# Altium PCB PCB2.PcbDoc (part 2 of 2)
Units mil, origin at the board's own origin, x right, y up, seen from the top; angles counter-clockwise.
Board outline 3622.05 x 2165.35 mil, 4 copper layers (Top Layer, GND, Sign, Bottom Layer), stack 41.556 mil thick; 150 components, 101 nets, 567 pads, 606 vias.
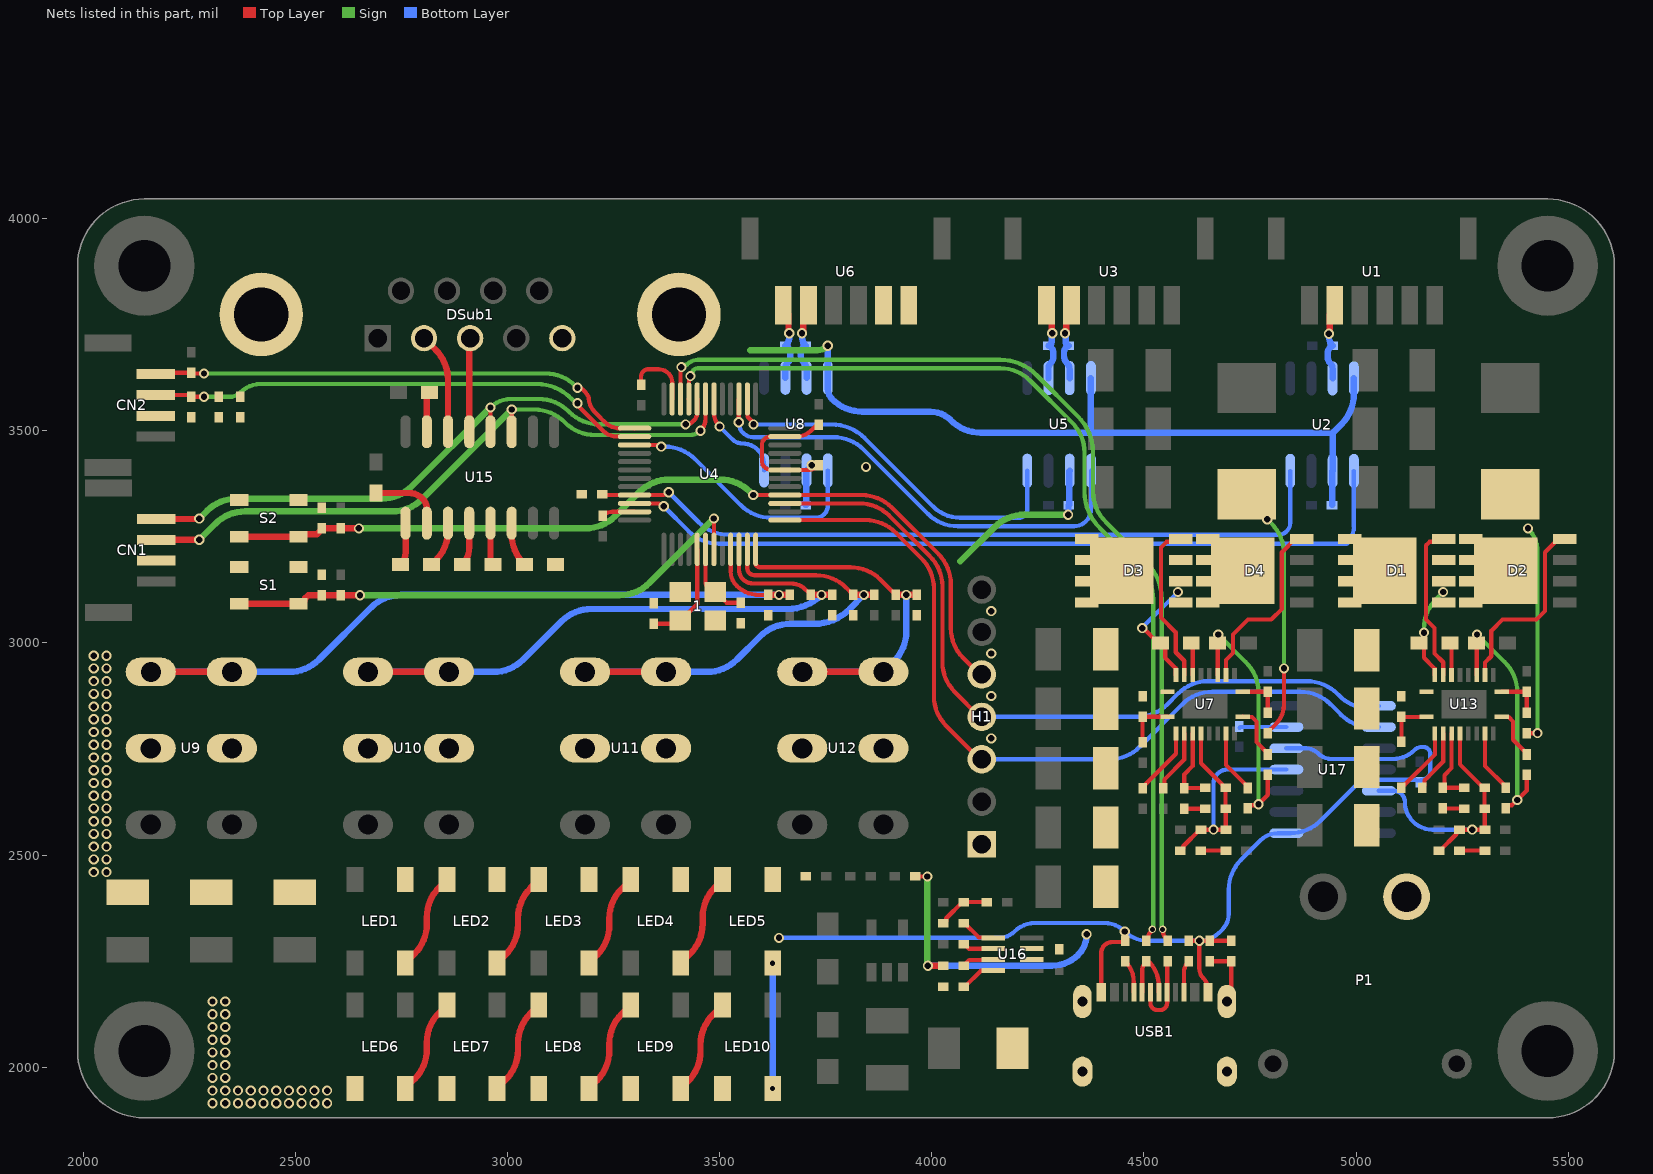
[diagram p4: the nets of this part, all layers, seen from the top]

## Via types
v1: diameter 24, hole 15, Top Layer to Bottom Layer, 572 vias
v2: diameter 18, hole 12, Top Layer to Bottom Layer, 33 vias
v3: diameter 30, hole 18, Top Layer to Bottom Layer, 1 vias

## Nets (pads, with @x,y where several pads share a name; then routed paths per layer and width w, separated by ;. In a path a pad name is that pad's centre, name@x,y a point inside that pad or via, vN(x,y) a via of type N, cw(c..) or ccw(c..) an arc to the next point about the centre after c; other vN are vias at no path point) (continued)
FDCAN1_P: R2.2 U1.5 U2.7 | length 186.3
  Top Layer w15: v1(4935.9,3728.73) ccw(c4931.74,3732.89) 4937.62,3732.89 4937.62,3766.96 cw(c4978,3766.96) U1.5@4949.45,3795.51
  Bottom Layer w15: v1(4935.9,3728.73) 4935.9,3721.97 ccw(c4966.97,3721.97) R2.2@4945,3700 ccw(c4945,3693.96) 4940.73,3698.23 4937.95,3695.45 ccw(c4948.93,3684.47) 4933.4,3684.47 4933.4,3673.18 ccw(c4952.8,3673.18) 4939.08,3659.46 cw(c4925.36,3645.74) 4944.76,3645.74 U2.7@4944.76,3623.6
FDCAN1_RX: R1.2 U2.4 U4.45 | length 1799.1
  Top Layer w10: R1.2@3223.2,3350 ccw(c3226.81,3353.61) 3226.81,3348.5 U4.45@3299.61,3348.5 3364.31,3348.5 ccw(c3364.31,3370.69) v1(3380,3355)
  Bottom Layer w10: v1(3380,3355) 3450.71,3284.29 ccw(c3521.42,3355) 3521.42,3255 4816.82,3255 ccw(c4816.82,3282.95) 4844.76,3282.71 U2.4@4844.76,3405.3
FDCAN1_TX: U2.1 U4.46 | length 1889.8
  Top Layer w10: U4.46@3299.61,3328.82 3357.81,3328.82 3364.43,3322.21 v1(3368.22,3322.21)
  Bottom Layer w10: v1(3368.22,3322.21) 3427.55,3262.87 ccw(c3498.26,3333.58) 3498.26,3233.58 4978.14,3233.58 ccw(c4938,3273.72) 4994.76,3273.72 U2.1@4994.76,3405.3
FDCAN2_N: R3.1 U3.6 U5.6 | length 179.1
  Top Layer w15: U3.6@4270.31,3795.51 cw(c4241.18,3766.38) 4282.38,3766.38 4282.38,3734.16 ccw(c4288.26,3734.16) v1(4284.1,3730)
  Bottom Layer w15: U5.6@4275,3624.15 4275,3645.89 cw(c4294.8,3645.89) 4280.8,3659.89 ccw(c4266.8,3673.9) 4286.6,3673.9 4286.6,3684.47 ccw(c4271.07,3684.47) R3.1@4282.05,3695.45 ; R3.1@4275,3700 ccw(c4275,3706.04) 4279.27,3701.77 ccw(c4271.76,3709.28) 4282.38,3709.28 4282.38,3725.84 cw(c4288.26,3725.84) v1(4284.1,3730)
FDCAN2_P: R3.2 U3.5 U5.7 | length 180
  Top Layer w15: v1(4314.1,3730) 4314.1,3730.26 cw(c4319.35,3730.26) 4315.64,3733.97 ccw(c4311.92,3737.69) 4317.18,3737.69 4317.18,3766.09 cw(c4358.78,3766.09) U3.5@4329.36,3795.51
  Bottom Layer w15: v1(4314.1,3730) cw(c4309.94,3725.84) 4315.82,3725.84 4315.82,3709.28 ccw(c4326.44,3709.28) 4318.93,3701.77 ccw(c4323.2,3706.04) R3.2@4323.2,3700 ; R3.2@4316.15,3695.45 ccw(c4327.13,3684.47) 4311.6,3684.47 4311.6,3676.07 ccw(c4334.48,3676.07) 4318.3,3659.89 cw(c4302.12,3643.72) 4325,3643.72 U5.7@4325,3624.15
FDCAN2_RX: U4.26 U5.4 | length 895.7
  Top Layer w10: U4.26@3565.53,3574.87 3565.7,3574.7 3565.7,3533.09 3580,3518.79 v1(3580,3515)
  Bottom Layer w10: v1(3580,3515) 3763.58,3515 cw(c3763.58,3402.93) 3842.82,3482.17 4004.25,3320.75 ccw(c4066.42,3382.93) 4066.42,3295 4205,3295 ccw(c4205,3315) 4225,3315 U5.4@4225,3405.85
FDCAN2_TX: U4.27 U5.1 | length 1097.6
  Top Layer w10: v1(3545,3520) 3545.33,3520.33 3545.33,3574.55 U4.27@3545.67,3574.88
  Bottom Layer w10: v1(3545,3520) 3545,3519.14 ccw(c3579.14,3519.14) 3555,3495 ccw(c3579.14,3519.14) 3579.14,3485 3768.58,3485 cw(c3768.58,3385) 3839.29,3455.71 3990.71,3304.29 ccw(c4061.42,3375) 4061.42,3275 4334.95,3275 ; 4335,3275 ccw(c4335,3315) 4375,3315 U5.1@4375,3405.85
FDCAN3_N: R5.1 U6.6 U8.6 | length 209.1
  Top Layer w15: U6.6@3662.42,3766.09 ccw(c3620.82,3766.09) U6.6@3650.23,3795.51 cw(c3620.92,3766.19) 3662.38,3766.19 3662.38,3734.16 ccw(c3668.26,3734.16) v1(3664.1,3730)
  Bottom Layer w15: U8.6@3655,3625 3655,3646.74 cw(c3674.8,3646.74) 3660.8,3660.74 ccw(c3646.8,3674.75) 3666.6,3674.75 3666.6,3684.47 ccw(c3651.07,3684.47) R5.1@3662.05,3695.45 ; R5.1@3655,3700 ccw(c3633.03,3721.97) 3664.1,3721.97 v1(3664.1,3730)
FDCAN3_P: R5.2 U6.5 U8.7 | length 177.3
  Top Layer w15: v1(3694.1,3730) 3694.1,3730.31 cw(c3699.22,3730.31) 3695.6,3733.93 ccw(c3691.98,3737.55) 3697.1,3737.55 3697.1,3766.09 cw(c3738.7,3766.09) U6.5@3709.28,3795.51
  Bottom Layer w15: v1(3694.1,3730) 3694.1,3721.97 ccw(c3725.17,3721.97) R5.2@3703.2,3700 ; R5.2@3696.15,3695.45 ccw(c3707.13,3684.47) 3691.6,3684.47 3691.6,3676.92 ccw(c3714.48,3676.92) 3698.3,3660.74 cw(c3682.12,3644.57) 3705,3644.57 U8.7@3705,3625
FDCAN3_RX: U4.30 U8.4 | length 234.2
  Top Layer w10: U4.30@3486.96,3574.53 U4.30@3486.61,3574.88 3486.61,3542.32 ccw(c3532.32,3542.32) v1(3500,3510) v1@3500,3513.79
  Bottom Layer w10: v1(3500,3510) 3530.25,3479.75 ccw(c3553.79,3503.28) 3553.79,3470 cw(c3553.79,3418.79) 3590,3455 cw(c3553.79,3418.79) 3605,3418.79 U8.4@3605,3406.7
FDCAN3_TX: U4.39 U8.1 | length 617.1
  Top Layer w10: U4.39@3299.61,3466.61 3354.6,3466.61 3358.58,3462.63 v1(3362.37,3462.63)
  Bottom Layer w10: v1(3362.37,3462.63) 3370.94,3462.63 cw(c3370.94,3362.63) 3441.66,3433.34 3550.71,3324.29 ccw(c3621.42,3395) 3621.42,3295 3725.9,3295 3725.96,3295 ccw(c3725.96,3324.04) 3755,3324.04 U8.1@3755,3406.7
GND: 1.2 1.4 C1.2 C2.2 C3.1 C4.1 C5.1 C6.1 C7.2 C8.1 C9.2 C10.1 C11.2 C14.1 C17.1 C20.1 C21.1 C22.1 C28.2 C30.2 C32.1 C33.1 C34.1 C35.1 C69.1 CN1.2 CN2.2 DSub1.5 H1.1 LED1.3 LED2.3 LED3.3 LED4.3 LED5.3 LED6.3 LED7.3 LED8.3 LED9.3 LED10.3 R1.1 R6.2 R10.2 R14.2 R44.1 R45.2 R46.2 S1.1 S2.1 U2.2 U2.8 U4.19 U4.23 U4.35 U4.47 U5.2 U5.8 U8.2 U8.8 U9.2 U9.5 U10.2 U10.5 U11.2 U11.5 U12.2 U12.5 U15.15 U17.1 U17.5 USB1.1 USB1.12 | length 5728.4
  Top Layer w8: v1(4455,2320) 4455.63,2319.37 R14.2@4455.63,2298.2
  Top Layer w10: C6.1@3225,3300 cw(c3247.05,3277.95) 3247.05,3309.13 U4.47@3299.61,3309.13 ; C11.2@3315,3608.2 3315,3627.93 cw(c3332.07,3627.93) 3320,3640 cw(c3332.07,3627.93) 3332.07,3645 3355.86,3645 cw(c3355.86,3610.86) 3380,3635 cw(c3360.23,3615.23) 3388.19,3615.23 U4.35@3388.19,3574.88 ; C10.1@3733.46,3418.65 cw(c3706.68,3445.43) 3706.68,3407.56 U4.19@3653.94,3407.56 3622.97,3407.56 cw(c3622.97,3432.97) 3605,3415 cw(c3617.07,3427.07) 3600,3427.07 3600,3467.93 cw(c3617.07,3467.93) 3605,3480 cw(c3620.21,3464.79) 3620.21,3486.3 U4.23@3653.94,3486.3 3681.92,3486.3 ccw(c3681.92,3533.08) 3715,3500 3726.44,3511.44 cw(c3733.46,3504.42) C5.1@3733.46,3514.35 ; USB1.1@4399.37,2176.65 4399.37,2269.37 cw(c4425,2269.37) 4425,2295 4452.43,2295 ccw(c4452.43,2298.2) R14.2@4455.63,2298.2 ; R6.2@4605.63,2298.2 v1(4630.63,2298.2) ; USB1.12@4651.34,2176.65 4651.34,2182.63 ccw(c4612.63,2182.63) 4640,2210 cw(c4662.62,2232.62) 4630.63,2232.62 v1(4630.63,2298.2) ; C9.2@4705.63,2298.2 R10.2@4655.63,2298.2 v1(4630.63,2298.2)
  Top Layer w15: U15.15@2810.01,3497.7 2810.01,3574.34 cw(c2832.16,3574.34) C22.1@2816.5,3590
  Sign w15: 3572.4,3690 3730.24,3690 ccw(c3730.24,3725.02) 3746.11,3693.81 ccw(c3730.24,3725.02) v1(3755,3700.26) ; v1(3717.1,3418.8) cw(c3720,3415.9) v1@3720,3420 ; 4067.54,3192.54 4147.93,3272.93 cw(c4218.64,3202.22) 4218.64,3302.22 v1(4321.36,3302.22)
  Bottom Layer w10: v1(3640,2305) 4158.79,2305 ccw(c4158.79,2356.21) 4195,2320 cw(c4243.28,2271.72) 4243.28,2340 4406.72,2340 cw(c4406.72,2271.72) v1(4455,2320) ccw(c4507.63,2372.63) 4507.63,2298.2 v1(4630.63,2298.2) ccw(c4630.63,2364.76) 4677.69,2317.7 4685,2325 ccw(c4648.79,2361.21) 4700,2361.21 4700,2418.58 cw(c4800,2418.58) 4729.29,2489.29 4775,2535 cw(c4815.25,2494.75) 4815.25,2551.67 U17.1@4835.64,2551.67 4845.25,2551.67 ccw(c4845.25,2651.67) 4915.96,2580.96 5000.77,2665.77 cw(c5028.8,2637.74) 5028.8,2677.38 5136.52,2677.38 cw(c5136.52,2658.32) 5143.46,2676.07 5148.45,2676.07 ccw(c5148.45,2706.55) 5170,2685 ccw(c5157.93,2697.07) 5175,2697.07 5175,2737.93 ccw(c5157.93,2737.93) 5170,2750 ccw(c5157.93,2737.93) 5157.93,2755 5155.4,2755 ccw(c5155.4,2730.13) 5137.82,2747.72 cw(c5087.23,2798.31) 5087.23,2726.76 4941.96,2726.76 cw(c4941.96,2771.96) 4910,2740 ccw(c4881.82,2711.82) 4881.82,2751.67 U17.5@4835.64,2751.67
  Bottom Layer w15: C7.2@3703.2,3325 3704.1,3325.9 3704.1,3405.8 U8.2@3705,3406.7 v1(3717.1,3418.8) ; v1(3755,3700.26) U8.8@3755,3625 3755,3599.14 ccw(c3789.14,3599.14) 3765,3575 3765.71,3574.29 ccw(c3836.42,3645) 3836.42,3545 3996.72,3545 cw(c3996.72,3476.72) 4045,3525 ccw(c4115.32,3593.92) 4115.26,3495.46 4375,3495.46 ; v1(4321.36,3302.22) 4322.28,3303.14 4322.28,3324.08 C2.2@4323.2,3325 4324.1,3325.9 4324.1,3404.95 U5.2@4325,3405.85 ; U5.8@4375,3624.15 4375,3495.46 ; C1.2@4943.2,3325 4943.98,3325.78 4943.98,3404.52 U2.2@4944.76,3405.3 4944.76,3494.76 ; U2.8@4994.76,3623.6 4994.76,3586.19 cw(c4894.76,3586.19) 4965.47,3515.47 4944.76,3494.76 ; 4375,3495.46 4944.76,3495.46 4945,3495.46 4944.76,3494.76
  other v1: 2305,1915 2335,1915 2365,1915 2395,1915 2425,1915 2455,1915 2485,1915 2515,1915 2545,1915 2575,1915 2305,1945 2335,1945 2365,1945 2395,1945 2425,1945 2455,1945 2485,1945 2515,1945 2545,1945 2575,1945 2305,1975 2335,1975 2305,2005 2335,2005 2305,2035 2335,2035 2305,2065 2335,2065 2305,2095 2335,2095 2305,2125 2335,2125 2305,2155 2335,2155 2025,2460 2055,2460 2025,2490 2055,2490 2025,2520 2055,2520 2025,2550 2055,2550 2025,2580 2055,2580 2025,2610 2055,2610 2025,2640 2055,2640 2025,2670 2055,2670 2025,2700 2055,2700 2025,2730 2055,2730 2025,2760 2055,2760 4140,2775 2025,2790 2055,2790 2025,2820 2055,2820 2025,2850 2055,2850 4140,2875 2025,2880 2055,2880 2025,2910 2055,2910 2025,2940 2055,2940 2025,2970 2055,2970 4140,2975 4140,3075 3845,3415
Net1_1: 1.1 C4.2 U4.6 | length 173.7
  Top Layer w10: U4.6@3466.93,3220.55 3466.93,3163.94 3466.93,3144.48 ccw(c3492.01,3144.48) 3472.76,3128.41 3474.52,3126.64 3476.36,3125.88 1.1@3489.8,3120.32 3491.77,3120.32 3510.39,3101.69 3510.39,3100.86 3516.25,3095 C4.2@3540,3095
Net1_3: 1.3 C3.2 U4.5 | length 248.6
  Top Layer w10: C3.2@3345,3045 3398.74,3045 1.3@3407.13,3053.39 ; 1.3@3409.09,3053.39 3447.24,3091.53 U4.5@3447.24,3220.55
NetC8_2: C8.2 R4.1 S1.2 U4.7 | length 1276.3
  Top Layer w10: U4.7@3486.61,3220.55 v1(3486.61,3293.39)
  Top Layer w15: S1.2@2367.68,3092.28 S1.2@2507.44,3092.28 2515.32,3092.28 2521.6,3098.56 2521.6,3103.6 2530.38,3112.39 C8.2@2562.56,3112.39 R4.1@2607.56,3112.39 v1(2652.39,3112.39)
  Sign w10: v1@3485,3295 cw(c3485,3293.39) v1(3486.61,3293.39)
  Sign w15: v1(2652.39,3112.39) 3264.2,3112.39 ccw(c3264.2,3212.39) 3334.91,3141.68 v1(3486.61,3293.39)
NetC9_1: C9.1 R10.1 USB1.13 USB1.14 | length 147.7
  Top Layer w10: R10.1@4655.63,2250 C9.1@4705.63,2250 4705.63,2179.14 cw(c4671.49,2179.14) USB1.14@4695.63,2155
NetC15_1: C15.1 R12.1 | length 60.1
  Top Layer w10: C15.1@5243.71,2510.83 R12.1@5303.78,2510.83
NetC24_1: C24.1 C25.2 U13.4 | length 186.8
  Top Layer w10: U13.4@5225.1,2786.41 5225.1,2705.1 5208.26,2688.26 5208.26,2662.38 C24.1@5204.34,2658.46 5208.26,2658.46 C25.2@5254.57,2658.46
NetC24_2: C24.2 R25.2 | length 50.6
  Top Layer w10: C24.2@5204.34,2610.26 5204.85,2609.76 5254.06,2609.76 R25.2@5254.57,2609.25
NetC26_1: C26.1 U15.2 | length 174
  Top Layer w15: C26.1@2690,3353.5 2767.41,3353.5 cw(c2767.41,3307.41) 2800,3340 cw(c2775.82,3315.82) 2810.01,3315.82 U15.2@2810.01,3282.3
NetC27_1: C27.1 U15.1 | length 100.4
  Top Layer w15: C27.1@2748.5,3185 ccw(c2720.7,3212.8) 2760.01,3212.8 U15.1@2760.01,3282.3
NetC27_2: C27.2 U15.3 | length 109
  Top Layer w15: C27.2@2821.5,3185 2830.72,3194.22 ccw(c2760.01,3264.94) 2860.01,3264.94 U15.3@2860.01,3282.3
NetC28_1: C28.1 U15.6 | length 105.4
  Top Layer w15: U15.6@3010.01,3282.3 3010.01,3256.41 ccw(c3110.01,3256.41) 3039.3,3185.7 C28.1@3040,3185
NetC29_1: C29.1 U15.4 | length 101.7
  Top Layer w15: C29.1@2893.5,3185 ccw(c2853.63,3224.87) 2910.01,3224.87 U15.4@2910.01,3282.3
NetC29_2: C29.2 U15.5 | length 99
  Top Layer w15: U15.5@2960.01,3282.3 2960.01,3200.66 ccw(c2982.16,3200.66) C29.2@2966.5,3185
NetC30_1: C30.1 DSub1.10 DSub1.11 R46.1
NetC41_1: C41.1 C43.2 U7.4 | length 186.9
  Top Layer w10: U7.4@4614.86,2786.5 4614.86,2709.86 4595.12,2690.12 C41.1@4595.12,2657.45 4595.62,2657.96 4643.82,2657.96 C43.2@4644.33,2658.46
NetC41_2: C41.2 R23.2 | length 49.2
  Top Layer w10: C41.2@4595.12,2609.25 R23.2@4644.33,2609.25
NetC42_1: C42.1 D1.3 D2.2 L1.1 R32.1 U13.19 | length 742.9
  Top Layer w10: v1(5160,3024.39) 5160,3010 5150,3000 5160,2990 5160,2965 5185.15,2939.85 5185.15,2924.65 U13.19@5185.67,2924.13 ; R32.1@5402.2,2787.43 v1(5427.43,2787.43)
  Sign w10: v1(5160,3024.39) 5160,3033.58 cw(c5260,3033.58) 5189.29,3104.29 v1(5205,3120) ; v1(5405,3270) cw(c5350.85,3215.85) 5427.43,3215.85 v1(5427.43,2787.43)
NetC42_2: C42.2 U13.17 | length 77.3
  Top Layer w10: C42.2@5221.5,3000 5225.04,2996.46 U13.17@5225.04,2924.13
NetC44_1: C44.1 U13.3 | length 148.4
  Top Layer w10: C44.1@5156.14,2658.46 5161.14,2663.46 5161.14,2676.14 5205.42,2720.42 U13.3@5205.42,2786.41
NetC49_2: C49.2 R30.2 R40.2 U13.14 | length 629.9
  Top Layer w10: U13.14@5284.1,2924.13 5284.1,2999.4 5285,3000.31 v1(5285,3020) ; R40.2@5352.99,2610.26 5352.99,2612.76 5357.99,2617.76 5367.14,2617.76 5379.38,2630 v1(5380,2630) ; v1@5377.32,2627.32 v1(5380,2630) ; R30.2@5402.2,2689 5402.2,2652.2 v1(5380,2630)
  Sign w10: v1(5285,3020) 5350.71,2954.29 cw(c5280,2883.58) 5380,2883.58 v1(5380,2630)
NetC50_2: C50.2 R32.2 U13.11 | length 108.2
  Top Layer w10: U13.11@5343.15,2884.76 5343.19,2884.8 C50.2@5402.2,2884.84 R32.2@5402.2,2835.63
NetC51_1: C51.1 R22.1 | length 60.1
  Top Layer w10: C51.1@4633.48,2510.83 R22.1@4693.54,2510.83
NetC52_1: C52.1 D3.3 D4.2 L2.1 R33.1 U7.19 | length 797.3
  Top Layer w10: v1(4496.15,3035) 4498.5,3035 4533.5,3000 C52.1@4538.5,3000 4540,3000 4550,2990 4550,2965 4574.92,2940.08 4574.92,2924.73 U7.19@4575.43,2924.22 ; R33.1@4791.97,2787.43 4791.97,2789.93 4810.98,2808.95 ccw(c4765.08,2854.85) 4830,2854.85 v1(4830,2940)
  Sign w10: v1(4790.76,3291.28) 4800.71,3281.33 cw(c4730,3210.62) 4800.77,3281.26 cw(c4730,3210.62) 4830,3210.62 v1(4830,2940)
  Bottom Layer w10: v1(4496.15,3035) 4496.15,3036.16 v1(4580,3120)
NetC52_2: C52.2 U7.17 | length 77.1
  Top Layer w10: C52.2@4611.5,3000 4614.8,2996.7 U7.17@4614.8,2924.22
NetC53_1: C53.1 U7.3 | length 149.5
  Top Layer w10: C53.1@4545.91,2657.45 4548.54,2660.08 4548.54,2678.54 4595.18,2725.18 U7.3@4595.18,2786.5
NetC59_2: C59.2 R31.2 R42.2 U7.14 | length 640
  Top Layer w10: U7.14@4673.86,2924.22 4673.86,2999.64 C59.2@4673.5,3000 ccw(c4669.88,3003.62) 4675,3003.62 v1(4675,3020) ; R42.2@4745,2610 4745,2612.32 4750,2617.32 4767.32,2617.32 v1(4770,2620) 4791.97,2641.97 R31.2@4791.97,2689
  Sign w10: v1(4675,3020) 4740.71,2954.29 cw(c4670,2883.58) 4770,2883.58 v1(4770,2620)
NetC60_2: C60.2 R33.2 U7.11 | length 108.3
  Top Layer w10: U7.11@4732.91,2884.85 C60.2@4791.97,2884.84 R33.2@4791.97,2835.63
NetC62_1: C62.1 U16.4 | length 86.1
  Top Layer w10: C62.1@4075,2189.37 4077.5,2189.37 4115.41,2227.28 4144.09,2227.28 U16.4@4145,2228.19
NetC62_2: C62.2 L3.1 U16.6
NetC68_2: C68.2 U16.2 | length 74.1
  Top Layer w10: C68.2@4075,2289.37 4077.5,2289.37 4087.5,2279.37 U16.2@4145,2279.37
NetD1_1: D1.1 U13.18 | length 370.5
  Top Layer w10: U13.18@5205.36,2924.13 5205.36,2954.64 5184.92,2975.08 5184.92,3035.08 5165,3055 5165,3230 5173.27,3238.27 5199.61,3238.27 D1.1@5206.62,3245.28
NetD2_1: D2.1 U13.13 | length 455
  Top Layer w10: U13.13@5303.84,2924.21 5303.84,2953.84 5318.49,2968.49 5318.49,3028.49 5345,3055 5425,3055 5445,3075 5445,3213.78 5476.5,3245.28 D2.1@5492.05,3245.28
NetD3_1: D3.1 U7.18 | length 378.5
  Top Layer w10: D3.1@4586.54,3245.28 4579.53,3238.27 4553.27,3238.27 4540,3225 4540,3060 4575,3025 4575,2978.03 4595.12,2957.92 U7.18@4595.12,2924.22
NetD4_1: D4.1 U7.13 | length 436.2
  Top Layer w10: U7.13@4693.6,2924.3 4693.6,2959.81 4710,2976.22 4710,3020 4745,3055 4800,3055 4825,3080 4825,3213.86 4856.42,3245.28 D4.1@4871.97,3245.28
NetLED1_2: LED1.2 LED2.4 | length 229
  Top Layer w15: LED1.2@2758.93,2245.24 2780.71,2267.02 ccw(c2710,2337.73) 2810,2337.73 2810,2353.29 cw(c2910,2353.29) 2839.29,2424 LED2.4@2857.37,2442.09
NetLED2_2: LED2.2 LED3.4 | length 229
  Top Layer w15: LED2.2@2975.47,2245.24 2995.71,2265.47 ccw(c2925,2336.19) 3025,2336.19 3025,2351.77 cw(c3125,2351.77) 3054.29,2422.48 LED3.4@3073.9,2442.09
NetLED3_2: LED3.2 LED4.4 | length 229
  Top Layer w15: LED3.2@3192,2245.24 3210.71,2263.95 ccw(c3140,2334.66) 3240,2334.66 3240,2350.23 cw(c3340,2350.23) 3269.29,2420.94 LED4.4@3290.43,2442.09
NetLED4_2: LED4.2 LED5.4 | length 229
  Top Layer w15: LED4.2@3408.53,2245.24 3430.71,2267.41 ccw(c3360,2338.12) 3460,2338.12 3460,2353.69 cw(c3560,2353.69) 3489.29,2424.4 LED5.4@3506.98,2442.09
NetLED5_2: LED5.2 LED10.4 | length 295.3
  Top Layer w15: v2(3625.04,2245.2) LED5.2@3625.08,2245.24
  Bottom Layer w15: v2(3625.04,1949.96) v2(3625.04,2245.2)
NetLED6_4: LED6.4 LED7.2 | length 229
  Top Layer w15: LED6.4@2758.94,1949.96 2780.71,1971.73 ccw(c2710,2042.44) 2810,2042.44 2810,2058.02 cw(c2910,2058.02) 2839.29,2128.73 LED7.2@2857.37,2146.81
NetLED7_4: LED7.4 LED8.2 | length 229
  Top Layer w15: LED7.4@2975.47,1949.96 2995.71,1970.2 ccw(c2925,2040.91) 3025,2040.91 3025,2056.49 cw(c3125,2056.49) 3054.29,2127.2 LED8.2@3073.9,2146.81
NetLED8_4: LED8.4 LED9.2 | length 229
  Top Layer w15: LED8.4@3192,1949.96 3210.71,1968.67 ccw(c3140,2039.38) 3240,2039.38 3240,2054.95 cw(c3340,2054.95) 3269.29,2125.66 LED9.2@3290.44,2146.81
NetLED9_4: LED9.4 LED10.2 | length 229
  Top Layer w15: LED9.4@3408.54,1949.96 3425.71,1967.13 ccw(c3355,2037.84) 3455,2037.84 3455,2053.41 cw(c3555,2053.41) 3484.29,2124.12 LED10.2@3506.98,2146.81
NetR6_1: R6.1 USB1.10 | length 76.4
  Top Layer w10: USB1.10@4594.26,2176.65 4594.26,2222.54 cw(c4633.09,2222.54) R6.1@4605.63,2250
NetR7_1: R7.1 USB1.6 USB1.8 | length 182
  Top Layer w10: USB1.6@4515.51,2176.65 4515.51,2150.85 ccw(c4530.85,2150.85) 4520,2140 ccw(c4532.07,2152.07) 4532.07,2135 4537.93,2135 ccw(c4537.93,2152.07) 4550,2140 ccw(c4538.23,2151.77) 4554.88,2151.77 USB1.8@4554.88,2176.65 4554.88,2248.18 cw(c4557.45,2248.18) R7.1@4555.63,2250
NetR8_1: R8.1 USB1.5 USB1.7 | length 160.9
  Top Layer w10: USB1.5@4495.83,2176.65 4495.83,2226.33 cw(c4529.3,2226.33) R8.1@4505.63,2250 R8.1@4506.35,2250 ; R8.1@4506.41,2250 4510.49,2250 R8.1@4513.42,2247.07 ; R8.1@4513.43,2247.06 4513.6,2246.89 cw(c4451.7,2190.79) 4535.2,2188.28 4535.2,2188.19 ccw(c4545.2,2188.07) 4535.2,2188.11 USB1.7@4535.2,2176.65
NetR9_2: R9.2 R11.2 U13.1 | length 118.1
  Top Layer w10: R11.2@5106.93,2766.73 R9.2@5106.93,2825.79 5106.97,2825.75 5165.95,2825.75 U13.1@5165.99,2825.7
NetR14_1: R14.1 USB1.4 | length 78.8
  Top Layer w10: R14.1@4455.63,2250 cw(c4406.1,2200.47) 4476.15,2200.47 USB1.4@4476.15,2176.65
NetR20_2: R20.2 R21.2 U7.1 | length 119.1
  Top Layer w10: R21.2@4496.69,2765.72 R20.2@4496.69,2825.79 U7.1@4555.75,2825.79
NetR24_1: R24.1 U13.2 | length 162.1
  Top Layer w10: R24.1@5106.93,2658.46 5106.93,2660.96 5111.93,2665.96 5114.43,2665.96 5185.73,2737.26 U13.2@5185.73,2786.41
NetR28_1: R28.1 U7.2 | length 161.7
  Top Layer w10: R28.1@4496.69,2657.45 4496.69,2659.95 4575.49,2738.75 U7.2@4575.49,2786.5
NetR30_1: R30.1 U13.10 | length 122.4
  Top Layer w10: U13.10@5343.15,2825.7 5343.66,2825.19 5359.81,2825.19 5370,2815 5370,2771.91 5402.2,2739.7 R30.1@5402.2,2737.2
NetR31_1: R31.1 U7.10 | length 125.5
  Top Layer w10: U7.10@4732.91,2825.79 4733.42,2825.28 4754.72,2825.28 4765,2815 4765,2766.67 4791.97,2739.7 R31.1@4791.97,2737.2
NetR36_2: R36.2 U16.3 | length 77.4
  Top Layer w10: R36.2@4075,2239.37 4077.5,2239.37 4082.5,2244.37 4082.5,2246.87 4088.5,2252.87 4144.09,2252.87 U16.3@4145,2253.78
NetR37_1: R37.1 R38.2 R39.2 | length 127.9
  Top Layer w10: R38.2@4026.8,2339.37 4029.3,2339.37 4034.3,2344.37 4034.3,2351.17 4072.5,2389.37 R37.1@4075,2389.37 R39.2@4130,2389.37
NetR38_1: R38.1 U16.1 | length 84.3
  Top Layer w10: R38.1@4075,2339.37 4077.5,2339.37 4111,2305.87 4144.09,2305.87 U16.1@4145,2304.96
NetR40_1: R40.1 U13.8 | length 148.3
  Top Layer w10: U13.8@5303.84,2786.41 5303.84,2710.12 5352.99,2660.96 R40.1@5352.99,2658.46
NetR42_1: R42.1 U7.8 | length 149.6
  Top Layer w10: U7.8@4693.6,2786.5 4693.6,2712.1 4745,2660.7 R42.1@4745,2658.2
NetR43_1: R43.1 U17.6 | length 111.9
  Bottom Layer w10: R43.1@4725,2800 4727.06,2802.06 4835.64,2802.06 U17.6@4835.64,2801.67
OLED_RESET: C17.2 H1.5 R19.1 S2.2 U4.16 | length 2093.7
  Top Layer w10: v1(3579.43,3348.5) U4.16@3653.94,3348.5 3835.08,3348.5 cw(c3835.08,3248.5) 3905.79,3319.21 4015.71,3209.29 cw(c3945,3138.58) 4045,3138.58 4045,3035.04 ccw(c4145,3035.04) 4074.29,2964.33 4112.83,2925.79 H1.5@4112.83,2937.17
  Top Layer w15: S2.2@2367.68,3250.08 S2.2@2507.44,3250.08 2513.72,3256.36 2551.23,3256.36 2562.56,3267.69 C17.2@2562.56,3270.19 R19.1@2607.56,3270.19 2607.74,3270 v1(2650,3270)
  Sign w10: v1@3573.99,3350.76 ccw(c3579.43,3356.2) v1(3579.43,3348.5)
  Sign w15: v1(2650,3270) 3183.58,3270 ccw(c3183.58,3370) 3254.29,3299.29 3310.71,3355.71 cw(c3381.42,3285) 3381.42,3385 3501.51,3385 cw(c3501.51,3285) 3572.22,3355.71 v1(3579.43,3348.5)
RXD: DSub1.2 U15.14 | length 239.7
  Top Layer w15: DSub1.2@2803.35,3718.19 2830.72,3690.82 cw(c2760.01,3620.1) 2860.01,3620.1 U15.14@2860.01,3497.7
SPI1_MOSI: H1.4 U4.15 U17.8 | length 1791.5
  Top Layer w10: U4.15@3653.94,3328.82 3829.76,3328.82 cw(c3829.76,3228.82) 3900.47,3299.53 3995.71,3204.29 cw(c3925,3133.58) 4025,3133.58 4025,2955.04 ccw(c4125,2955.04) 4054.29,2884.33 H1.4@4112.83,2825.79
  Bottom Layer w10: H1.4@4112.83,2825.79 4484.37,2825.79 ccw(c4484.37,2925.79) 4555.08,2855.08 4580.71,2880.71 cw(c4651.42,2810) 4651.42,2910 4881.85,2910 cw(c4881.91,2802.72) 4957.61,2878.73 cw(c4950.55,2871.65) 4957.97,2878.35 ccw(c5028.99,2942.11) 4989.85,2855.07 4989.98,2855.01 ccw(c5005.58,2889.81) 5005.58,2851.67 ; 5005.63,2851.67 U17.8@5053.68,2851.67
SPI1_SCK: H1.3 U4.13 U17.9 | length 1900.6
  Top Layer w10: U4.13@3653.94,3289.45 3844.13,3289.45 cw(c3844.13,3189.45) 3914.84,3260.16 3975.71,3199.29 cw(c3905,3128.58) 4005,3128.58 4005,2875.04 ccw(c4105,2875.04) 4034.29,2804.33 H1.3@4112.83,2725.79
  Bottom Layer w10: H1.3@4112.83,2725.79 4419.37,2725.79 ccw(c4419.37,2825.79) 4490.08,2755.08 4590.71,2855.71 cw(c4661.42,2785) 4661.42,2885 4868.58,2885 cw(c4868.58,2785) 4939.29,2855.71 4964.04,2830.96 ccw(c5034.75,2901.67) 5034.75,2801.67 U17.9@5053.68,2801.67
SWCLK: CN2.3 R45.1 U4.38 | length 1184
  Top Layer w10: CN2.3@2171.1,3584.61 2243.87,3584.61 cw(c2243.87,3568.87) R45.1@2255,3580 v1(2285,3580) ; v1(3165,3565) ccw(c3177.07,3565) 3168.54,3556.46 3225,3500 ccw(c3258.08,3533.08) 3258.08,3486.3 U4.38@3299.61,3486.3
  Sign w10: v1(2285,3580) 2345.86,3580 ccw(c2345.86,3614.14) 2370,3590 cw(c2418.28,3541.72) 2418.28,3610 3069.64,3610 cw(c3069.64,3497.82) 3139.97,3585.22 cw(c3069.64,3497.82) 3149.01,3577.1 3152.69,3573.42 ccw(c3163.36,3583.96) 3159.16,3569.56 cw(c3156.36,3559.96) 3164.72,3565.45 3164.97,3565.07 v1(3165,3565)
SWDIO: CN2.4 R41.1 U4.37 | length 1158.3
  Top Layer w10: CN2.4@2171.1,3633.82 cw(c2178.29,3626.63) 2178.29,3636.8 R41.1@2255,3636.8 ccw(c2259.35,3641.15) 2259.35,3635 v1(2285,3635) ; v1@3168.79,3601.21 v1(3165,3601.21) cw(c3165,3580) 3180,3595 3181.06,3593.94 cw(c3146.87,3559.64) 3190.73,3580.19 cw(c3181.66,3575.97) 3191.65,3576.39 ccw(c3239.38,3578.17) 3205.64,3544.36 3220.57,3529.43 3220.65,3529.35 3228.86,3521.14 ccw(c3266.31,3558.59) U4.37@3266.31,3505.63 ; U4.37@3299.26,3506.33 U4.37@3299.61,3505.98
  Sign w10: v1(2285,3635) 3089.79,3635 cw(c3089.79,3535) 3160.5,3605.71 v1(3165,3601.21)
Switch1: C32.2 R15.1 U4.9 U9.1 U9.4 | length 1958.2
  Top Layer w10: U4.9@3525.98,3220.55 3525.98,3168.84 ccw(c3573.84,3168.84) 3540,3135 ccw(c3592.63,3187.63) 3592.63,3113.2 C32.2@3615,3113.2
  Top Layer w15: U9.4@2159.44,2931.73 U9.1@2350.44,2931.73 ; C32.2@3615,3113.2 v1(3640,3113.2) R15.1@3665,3113.2
  Bottom Layer w15: U9.4@2159.44,2931.73 U9.1@2350.44,2931.73 2485.31,2931.73 ccw(c2485.31,3031.73) 2556.02,2961.02 2678.91,3083.91 cw(c2749.62,3013.2) 2749.62,3113.2 v1(3640,3113.2)
Switch2: C33.2 R16.1 U4.10 U10.1 U10.4 | length 1616.2
  Top Layer w10: U4.10@3545.67,3220.55 3545.67,3172.53 ccw(c3577.53,3172.53) 3555,3150 ccw(c3579.14,3174.14) 3579.14,3140 3667.99,3140 cw(c3667.99,3091.21) 3702.49,3125.71 R16.1@3715,3113.2
  Top Layer w15: U10.4@2671.25,2931.73 U10.1@2862.25,2931.73 ; R16.1@3715,3113.2 v1(3740,3113.2) C33.2@3765,3113.2
  Bottom Layer w15: U10.4@2671.25,2931.73 U10.1@2862.25,2931.73 2966.73,2931.73 ccw(c2966.73,3031.73) 3037.44,2961.02 3127.13,3050.71 cw(c3197.84,2980) 3197.84,3080 3659.85,3080 ccw(c3659.85,3193.35) v1(3740,3113.2)
Switch3: C34.2 R17.1 U4.11 U11.1 U11.4 | length 1277.9
  Top Layer w10: U4.11@3565.35,3220.55 3565.35,3175.34 ccw(c3579.95,3175.34) 3569.63,3165.02 ccw(c3582.54,3177.93) 3582.54,3159.67 3727.11,3159.67 cw(c3727.11,3059.67) 3797.82,3130.38 C34.2@3815,3113.2
  Top Layer w15: U11.4@3183.06,2931.73 U11.1@3374.06,2931.73 ; C34.2@3815,3113.2 v1(3840,3113.2) R17.1@3865,3113.2
  Bottom Layer w15: U11.4@3183.06,2931.73 U11.1@3374.06,2931.73 3470.31,2931.73 ccw(c3470.31,3031.73) 3541.02,2961.02 3595.71,3015.71 cw(c3666.42,2945) 3666.42,3045 3723.31,3045 ccw(c3723.31,3162.07) 3806.09,3079.29 v1(3840,3113.2)
Switch4: C35.2 R18.1 U4.12 U12.1 U12.4 | length 1057.3
  Top Layer w10: U4.12@3585.04,3220.55 3585.04,3187.47 ccw(c3593.03,3187.47) 3587.38,3181.82 ccw(c3596.21,3190.65) 3596.21,3178.16 3808.62,3178.16 cw(c3808.62,3078.16) 3879.33,3148.87 R18.1@3915,3113.2 ; U12.1@3885.87,2931.73 U12.1@3910.71,2956.57
  Top Layer w15: U12.4@3694.87,2931.73 U12.1@3885.87,2931.73 ; R18.1@3915,3113.2 v1(3940,3113.2) C35.2@3965,3113.2
  Bottom Layer w15: U12.4@3694.87,2931.73 U12.1@3885.87,2931.73 3910.71,2956.57 ccw(c3840,3027.28) 3940,3027.28 v1(3940,3113.2)
TXD: DSub1.3 U15.13 | length 221
  Top Layer w15: U15.13@2910.01,3497.7 2910.01,3713.37 cw(c2916.83,3713.37) DSub1.3@2912.01,3718.19
USART1_RX: CN1.4 U4.32 U15.12 | length 1501.6
  Top Layer w10: U15.12@2960.01,3497.7 v1(2960,3555) ; v1@3418.81,3515.11 v1(3419.89,3515.11) ; v1@3420,3515 ccw(c3420,3539.14) 3437.07,3522.07 3440,3525 ccw(c3422.51,3542.49) 3447.24,3542.49 U4.32@3447.24,3574.88
  Top Layer w15: CN1.4@2172.2,3292.17 v1@2272.75,3292.17
  Sign w10: v1(2960,3555) cw(c3008.28,3506.72) 3008.28,3575 3073.58,3575 cw(c3073.58,3475) 3144.29,3545.71 3145.6,3544.4 ccw(c3216.31,3615.11) 3216.31,3515.11 v1(3419.89,3515.11)
  Sign w15: v1(2273.58,3293) 2291.29,3310.71 cw(c2362,3240) 2362,3340 2703.58,3340 ccw(c2703.58,3440) 2774.29,3369.29 v1(2960,3555)
USART1_TX: CN1.3 U4.31 U15.11 | length 1550.7
  Top Layer w10: U15.11@3010.01,3497.7 v1(3010,3550) ; v1(3455,3500) ccw(c3426.2,3528.8) 3466.93,3528.8 U4.31@3466.93,3574.88
  Top Layer w15: CN1.3@2172.2,3242.96 2273.54,3242.96 v1(2273.58,3243)
  Sign w10: v1(3010,3550) 3063.58,3550 cw(c3063.58,3450) 3134.29,3520.71 3135.71,3519.29 ccw(c3206.42,3590) 3206.42,3490 3430.86,3490 ccw(c3430.86,3524.14) v1(3455,3500)
  Sign w15: v1(2273.58,3243) 2311.29,3280.71 cw(c2382,3210) 2382,3310 2728.58,3310 ccw(c2728.58,3410) 2799.29,3339.29 v1(3010,3550)
USB_N: R8.2 U4.33 | length 2294.7
  Top Layer w10: U4.33@3427.56,3574.88 3427.9,3575.23 v1@3427.9,3619.12 ; R8.2@4505.63,2298.2 R8.2@4507,2299.57 ; R8.2@4507.01,2299.58 ccw(c4498.24,2308.33) 4510.63,2308.33 cw(c4523.02,2308.33) 4514.26,2317.09 4518.47,2321.3 ccw(c4514.77,2325) v2(4520,2325)
  Sign w10: v1(3431.21,3628.79) cw(c3440.36,3628.79) 3433.89,3635.25 3435.61,3636.97 ccw(c3432.81,3639.77) 3436.77,3639.77 cw(c3440.73,3639.77) 3437.93,3642.57 cw(c3449.27,3631.23) 3449.27,3647.27 4161.31,3647.27 cw(c4161.31,3547.27) 4232.02,3617.98 4330.71,3519.29 cw(c4260,3448.58) 4360,3448.58 4360,3356.42 ccw(c4480,3356.42) 4395.15,3271.57 4492.71,3174.01 cw(c4422,3103.29) 4522,3103.29 4522,2332.66 ccw(c4523.13,2331.52) 4521.53,2331.52 4521.53,2328.7 cw(c4516.3,2328.7) v2(4520,2325)
USB_P: R7.2 U4.34 | length 2372.4
  Top Layer w10: U4.34@3407.87,3574.88 3407.87,3647.87 v1(3410,3650) ; v2(4544,2325) cw(c4540.3,2321.3) 4545.53,2321.3 4545.53,2317.94 ccw(c4562.77,2317.94) R7.2@4550.57,2305.76 ; R7.2@4550.58,2305.75 4553.86,2302.47 cw(c4549.59,2298.2) R7.2@4555.63,2298.2
  Sign w10: v1(3410,3650) ccw(c3410,3659.15) 3416.47,3652.68 3418.18,3654.4 cw(c3420.99,3651.59) 3420.99,3655.56 ccw(c3420.99,3659.52) 3423.79,3656.72 cw(c3449.27,3631.23) 3449.27,3667.27 4161.31,3667.27 cw(c4161.31,3547.27) 4246.16,3632.12 4344.85,3533.43 cw(c4260,3448.58) 4380,3448.58 4380,3356.42 ccw(c4480,3356.42) 4409.29,3285.71 4506.85,3188.15 cw(c4422,3103.29) 4542,3103.29 4542,2332.66 cw(c4540.87,2331.52) 4542.47,2331.52 4542.47,2328.7 ccw(c4547.7,2328.7) v2(4544,2325)
VIN: C12.2 C13.2 C16.2 C23.2 C36.2 C37.2 C38.2 C39.2 C63.2 C64.2 D1.2 D3.2 P1.+ R9.1 R20.1 R34.2 R36.1 U6.1 U6.2 U7.20 U13.20 U16.7 | length 689.6
  Top Layer w10: R34.2@3961.22,2449.68 v1(3989.68,2449.68)
  Top Layer w15: v1(3990.88,2239.37) R36.1@4026.8,2239.37
  Sign w15: v1(3989.68,2449.68) 3989.68,2242.26 ccw(c3993.77,2242.26) v1(3990.88,2239.37)
  Bottom Layer w15: v1(3990.88,2239.37) 4283.12,2239.37 ccw(c4283.12,2326.88) 4345,2265 ccw(c4296.72,2313.28) v1(4365,2313.28)
W2_1: C15.2 C25.1 R13.1 R25.1 R26.1 U13.5 U17.12 | length 656.9
  Top Layer w10: C15.2@5195.51,2510.83 5198.01,2510.83 5236.21,2549.03 5236.21,2555.04 5241.21,2560.04 R13.1@5243.71,2560.04 v1(5273.75,2560) R26.1@5303.78,2560.04 5303.27,2560.55 5303.27,2608.75 R25.1@5302.77,2609.25 C25.1@5302.77,2658.46 5300.27,2658.46 5244.79,2713.94 U13.5@5244.79,2786.41
  Bottom Layer w10: U17.12@5053.68,2651.67 5088.33,2651.67 cw(c5088.33,2625) 5115,2625 ccw(c5180,2625) 5180,2560 v1(5273.75,2560)
W2_2: C43.1 C51.2 R23.1 R27.1 R29.1 U7.5 U17.4 | length 683.2
  Top Layer w10: C51.2@4585.28,2510.83 4587.78,2510.83 4592.78,2515.83 4592.78,2520.83 4631.99,2560.04 R27.1@4634.49,2560.04 v1(4664.02,2560.04) R29.1@4693.54,2560.04 4693.04,2560.55 4693.04,2608.75 R23.1@4692.53,2609.25 C43.1@4692.53,2658.46 4690.03,2658.46 4685.03,2663.46 4685.03,2665.96 4634.55,2716.45 U7.5@4634.55,2786.5
  Bottom Layer w10: v1(4664.02,2560.04) 4664.02,2669.02 cw(c4696.67,2669.02) 4696.67,2701.67 U17.4@4835.64,2701.67
pads on no net: CN1.5 CN1.6 CN2.5 CN2.6 DSub1.1 DSub1.4 DSub1.6 DSub1.7 DSub1.8 DSub1.9 LED6.2 P1.0 U2.5 U4.2 U4.3 U4.4 U4.14 U4.22 U4.28 U4.29 U4.40 U4.43 U4.44 U5.5 U7.7 U7.9 U7.16 U8.5 U9.3 U9.6 U10.3 U10.6 U11.3 U11.6 U12.3 U12.6 U13.7 U13.9 U13.16 U14.3 U14.4 U15.7 U15.8 U15.9 U15.10 U16.8 U17.2 U17.14 USB1.2 USB1.3 USB1.9 USB1.11

## Polygon pours and split planes (outlines as drawn)
GND on Top Layer "NONET_L-01_P-001" (solid, remove dead copper, pour order 39): 2005,3750 2295,3750 2295,3550 2390,3550 2560,3720 2560,3865 3275,3865 3275,3725 3345,3655 3635,3655 4150,3140 4150,2460 3725,2460 3725,2410 3665,2410 3665,2290 2690,2290 2690,2345 2005,2345 2005,2545
GND on Top Layer "NONET_L-01_P-001" (solid, pour order 33): 2285,2185 2285,1895 3580,1895 3580,2140 3530,2190 3480,2190 3455,2165 3455,2105 2690,2105 2690,2160 2665,2185
A2_1 on Top Layer "Top Layer-A2_1" (solid, pour order 26): 4470,2505 4525,2450 4780,2450 4890,2340 4955,2340 4990,2375 4990,2450 4955,2485 4955,3040 4935,3060 4935,3280 5090,3280 5090,3865 5220,3865 5220,3690 5445,3690 5445,3270 5530,3270 5530,3220 5470,3220 5460,3210 5460,3065 5435,3040 5350,3040 5330,3020 5330,2960 5315,2945 5315,2905 5310,2900 5195,2900 5195,2815 5315,2815 5315,2885 5350,2920 5420,2920 5450,2890 5450,2665 5380,2595 5380,2485 5185,2485 5175,2495 5175,2530 5195,2530 5215,2550 5215,2585 5195,2585 5185,2595 5185,2640 5090,2640 5090,2639.69 5080,2629.69 5080,2555 5200,2435 5200,2300 5105,2205 4755,2205 4755,1900 5310,1900 5310,2095 5590,2375 5590,3705 5545,3750 5385,3750 5300,3835 5300,4030 3545,4030 3545,3755 4160,3140 4160,2335 4265,2335 4310,2380 4310,3085 3850,3545 3850,3860 3995,3860 3995,3635 4345,3285 4475,3285 4475,3865 4600,3865 4600,3690 4820,3690 4820,3280 4905,3280 4905,3220 4855,3220 4840,3205 4840,3050 4830,3040 4750,3040 4725,3015 4725,2970 4705,2950 4705,2911.86 4693.14,2900 4585,2900 4585,2815 4705,2815 4705,2888.14 4716.86,2900 4774.5,2900 4774.5,2909.5 4806,2909.5 4806,2948 4823,2965 4850,2965 4850,2660 4780,2590 4780,2490 4565,2490 4565,2530 4580,2530 4600,2550 4600,2575 4585,2575 4560,2600 4560,2635 4470,2635
A2_1 on Top Layer "NONET_L-01_P-001" (solid, pour order 13): 3680,2135 3680,2115 3740,2055 3965,2055 3965,2190 3915,2190 3915,2245 3880,2245 3880,2190 3865,2190 3810,2135
NetC42_1 on Top Layer "NONET_L-01_P-001" (solid, pour order 6): 5180,3220 5240,3220 5240,3430 5430,3430 5430,3089.88 5410.12,3070 5180,3070
NetC52_1 on Top Layer "NONET_L-01_P-001" (solid, pour order 3): 4560,3220 4620,3220 4620,3430 4810,3430 4810,3089.88 4790.12,3070 4560,3070
NetC9_1 on Top Layer "NONET_L-01_P-001" (solid, pour order 0): 4375,2200 4335,2200 4315,2180 4315,1895 4735,1895 4735,2180 4715,2200
VIN on Top Layer "Top Layer-VIN" (solid, pour order 10): 4735,2335 4855,2215 5100,2215 5190,2305 5190,2435 5070,2555 5070,2860 5185,2860 5185,2895 5070,2895 5070,3060 5080,3070 5145,3070 5145,3265 4945,3265 4945,3060 4965,3040 4965,2490 5000,2455 5000,2370 4960,2330 4885,2330 4775,2440 4520,2440 4460,2500 4460,2860 4575,2860 4575,2895 4460,2895 4460,2900 4460,3065 4525,3065 4525,3265 4350,3265 3980,3635 3980,3845 3865,3845 3865,3545 4320,3090 4320,2375 4275,2330 4275,2290 4205,2290 4205,2270 4275,2270 4285,2260 4335,2260 4410,2335
NetC30_1 on Top Layer "NONET_L-01_P-001" (solid, pour order 38): 2310,3565 2310,4030 3530,4030 3530,3745 3455,3670 3350,3670 3290,3730 3290,3875 3285,3880 2550,3880 2545,3875 2545,3730 2380,3565
3V3 on Top Layer "NONET_L-01_P-001" (solid, pour order 29): 3680,2305 3870,2305 3870,2370 3845,2395 3680,2395
A2_1 on Top Layer "NONET_L-01_P-001" (solid, pour order 27): 3680,2175 3680,2290 3835,2290 3835,2230 3780,2175
24to12_1 on Top Layer "NONET_L-01_P-001" (solid, pour order 5): 5105,3850 5105,3280 5225,3280 5225,3450 5230,3445 5430,3445 5430,3675 5205,3675 5205,3850
A2_1 on Top Layer "NONET_L-01_P-001" (solid, pour order 14): 4210,2190 4210,2235 4280,2235 4290,2245 4320,2245 4320,2205 4305,2190
+5 on Top Layer "NONET_L-01_P-001" (solid, pour order 12): 2005,2335 2005,2200 2670,2200 2710,2160 2710,2115 2795,2115 2795,2160 2830,2195 2890,2195 2935,2150 2935,2115 3015,2115 3010,2120 3010,2160 3045,2195 3105,2195 3155,2145 3155,2115 3225,2115 3230,2120 3230,2165 3265,2200 3315,2200 3365,2150 3365,2120 3445,2120 3445,2170 3480,2205 3530,2205 3595,2140 3595,2075 3775,1895 4115,1895 4115,2125 3975,2125 3975,2045 3735,2045 3670,2110 3670,2190 3600,2190 3550,2240 3550,2275 3475,2275 3475,2245 3425,2195 3370,2195 3325,2240 3325,2275 3255,2275 3255,2235 3210,2190 3155,2190 3105,2240 3105,2275 3045,2275 3045,2245 2995,2195 2950,2195 2890,2255 2890,2275 2825,2275 2825,2240 2780,2195 2720,2195 2680,2235 2680,2335
NetC62_2 on Top Layer "NONET_L-01_P-001" (solid, pour order 11): 4015,2205 4015,2155 4030,2140 4130,2140 4130,1895 4295,1895 4295,2180 4200,2180 4200,2245 4270,2245 4270,2265 4180,2265 4180,2210 4135,2165 4050,2165 4040,2175 4040,2205
24to12_2 on Top Layer "NONET_L-01_P-001" (solid, pour order 4): 4485,3850 4485,3280 4605,3280 4605,3450 4610,3445 4810,3445 4810,3675 4585,3675 4585,3850
GND on GND "NONET_L-01_P-001" (solid, remove dead copper, pour order 37): 2205,3750 2280,3825 2280,4030 3530,4030 3530,3760 4155,3135 4155,2460 3825,2460 3675,2310 3675,1895 2285,1895 2285,2090 2200,2175 2005,2175 2005,3750
A2_1 on GND "NONET_L-01_P-001" (solid, pour order 36): 3685,2300 3685,1895 5310,1895 5310,2095 5590,2375 5590,3705 5545,3750 5385,3750 5300,3835 5300,4030 3545,4030 3545,3765 4165,3145 4165,2445 3830,2445
GND on Sign "NONET_L-01_P-001" (solid, remove dead copper, pour order 41): 2205.22,3750.26 2280.22,3825.26 2280.22,4030.26 3530.22,4030.26 3530.22,3760.26 4150.22,3140.26 4150.22,2460.26 3825.22,2460.26 3675.22,2310.26 3675.22,1895.26 2285.22,1895.26 2285.22,2090.26 2200.22,2175.26 2005.22,2175.26 2005.22,3750.26
A2_1 on Sign "NONET_L-01_P-001" (solid, remove dead copper, pour order 34): 3685,2300 3685,1895 5310,1895 5310,2095 5590,2375 5590,3705 5545,3750 5385,3750 5300,3835 5300,4030 3545,4030 3545,3765 4165,3145 4165,2445 3830,2445
GND on Bottom Layer "NONET_L-01_P-001" (solid, remove dead copper, pour order 40): 2205,3750 2280,3825 2280,4030 3530,4030 3530,3760 4150,3140 4150,2460 3825,2460 3675,2310 3675,1895 2285,1895 2285,2090 2200,2175 2005,2175 2005,3750
A2_1 on Bottom Layer "NONET_L-01_P-001" (solid, remove dead copper, pour order 28): 3685,2300 3685,1895 5310,1895 5310,2095 5590,2375 5590,3705 5545,3750 5385,3750 5300,3835 5300,4030 3545,4030 3545,3765 4165,3145 4165,2445 3830,2445

## Silkscreen, mask and mechanical layers (free items; w line width, h text height)
Mechanical 1:
  the board outline again, w10

## Text inside footprints (layer, text, board x,y; h text height)
DSub1: Top Overlay "1" at 2622.69,3713.69 h35 r180; Top Overlay "5" at 3179.69,3717.69 h35 r180; Top Overlay "9" at 3127.01,3842.71 h35 r185; Top Overlay "6" at 2662.45,3846.64 h35 r185